# Altium PCB LM-008.PcbDoc (part 3 of 3)
Units mil, origin at the board's own origin, x right, y up, seen from the top; angles counter-clockwise.
Board outline 2639.74 x 2756.53 mil, 2 copper layers (Top Layer, Bottom Layer); 59 components, 36 nets, 707 pads, 397 vias.
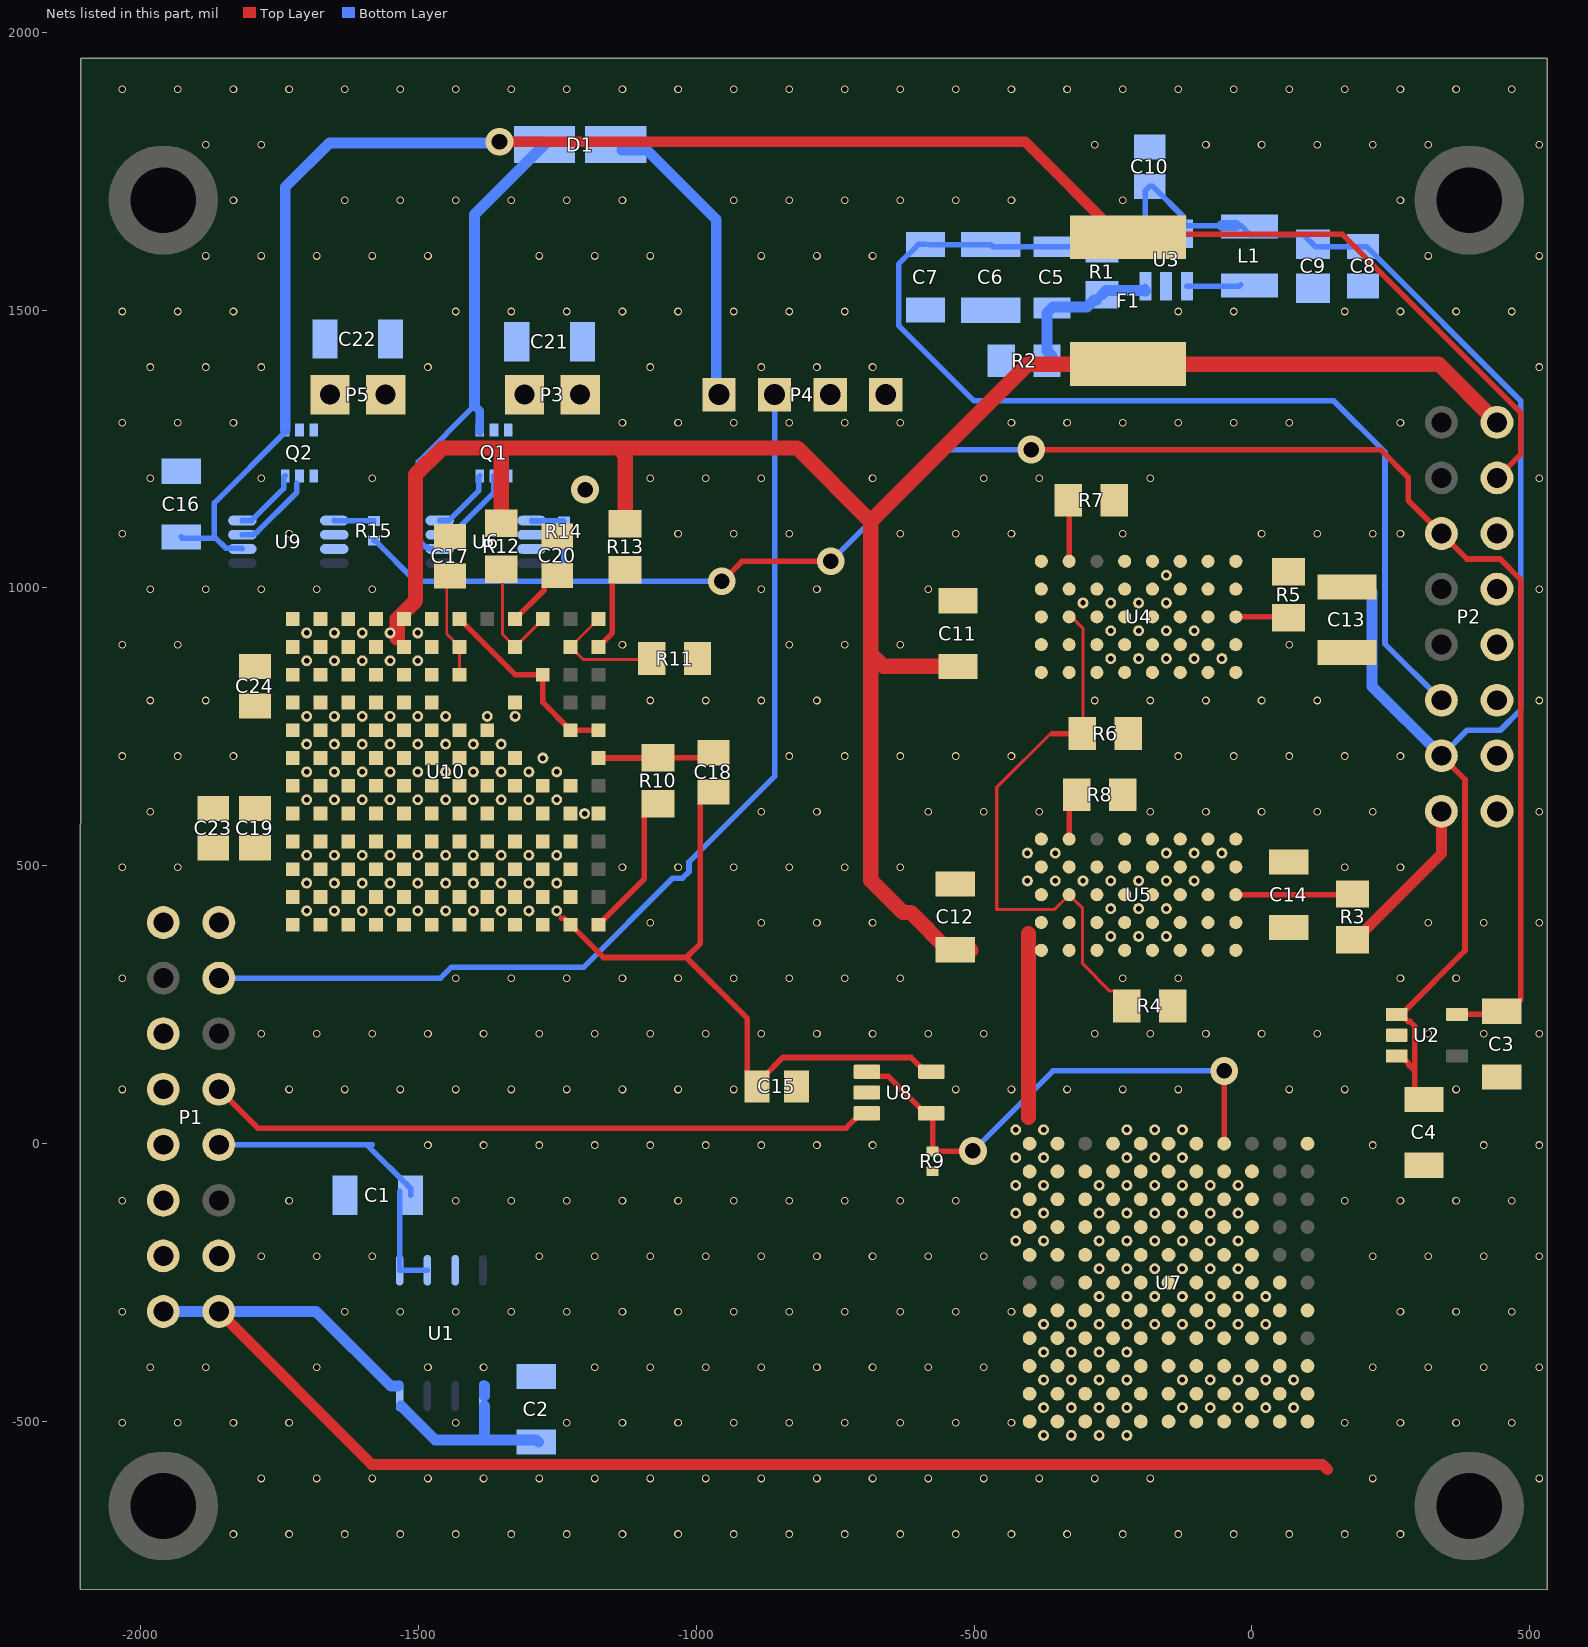
[diagram p2: the nets of this part, all layers, seen from the top]

## Via types
v1: diameter 13.78, hole 9.84, Top Layer to Bottom Layer, 390 vias
v2: diameter 50, hole 28, Top Layer to Bottom Layer, 7 vias

## Nets (pads, with @x,y where several pads share a name; then routed paths per layer and width w, separated by ;. In a path a pad name is that pad's centre, name@x,y a point inside that pad or via, vN(x,y) a via of type N, cw(c..) or ccw(c..) an arc to the next point about the centre after c; other vN are vias at no path point)
+3.3: C3.2 P2.6 R14.2 R15.2 U2.5 | length 3287.5
  Top Layer w10: v2(-954,1012) -918,1048 v2(-758,1048) ; v2(-397,1249) 231,1249 281.31,1198.69 281.31,1157.69 386.91,1052.09 446.88,1052.09 483.4,1015.56 483.4,259.17 462.53,238.3 C3.2@449.74,238.3 ; U2.5@364.94,232.59 C3.2@456.83,232.59
  Bottom Layer w10: R15.2@-1580,1085.28 -1578.03,1085.28 -1504.75,1012 -1267,1012 ; R14.2@-1238,1084.28 -1238,1041 -1267,1012 ; v2(-954,1012) -1267,1012 ; v2(-758,1048) -557,1249 v2(-397,1249)
+5: C4.2 C8.2 C9.2 C10.2 C13.1 L1.1 P2.14 R5.1 U2.1 U2.3 U3.4 U3.6 U4.A1 U4.A2 U4.B1 U4.B2 | length 2742.3
  Top Layer w10: U2.3@268.48,157.79 282.23,144.03 282.23,142.03 289,135.26 ; C4.2@289,95.82 305.57,79.24 C4.2@309.74,79.24 293.17,95.82 293.17,135.26 293.17,211.16 284.45,219.87 281.2,219.87 273.28,227.79 273.28,237.39 383.4,347.51 383.4,655.6 P2.14@341,698
  Bottom Layer w10: U3.4@-191.65,1637.6 -191.65,1714.91 C10.2@-184,1722.57 -178.09,1722.57 -122.68,1667.15 -122.68,1658.19 -116.58,1652.09 L1.1@-54,1652.09 ; L1.1@-20,1652.09 -3.35,1635.44 92.87,1635.44 113.94,1614.38 205.91,1614.38 483.4,1336.88 483.4,780.44 446.88,743.91 386.91,743.91 P2.14@345.5,702.5
  Bottom Layer w19.68: L1.1@-54,1652.09 L1.1@-29,1652.09 ; 216.16,992.84 216.16,822.84 P2.14@341,698
  other v1: 17.26,1097.53 117.26,1097.53 217.26,1097.53
"+5 BBB": C15.1 C18.2 C19.2 C23.2 P1.1 pad.4@-1251,419 pad.4@-1251,469 pad.4@-1251,519 pad.4@-1301,419 pad.4@-1301,469 pad.4@-1301,519 pad.4@-1351,419 pad.4@-1351,469 pad.4@-1351,519 pad.4@-1401,419 pad.4@-1401,469 pad.4@-1401,519 pad.4@-1451,419 pad.4@-1451,469 pad.4@-1451,519 pad.4@-1501,419 pad.4@-1501,469 pad.4@-1501,519 pad.4@-1551,419 pad.4@-1551,469 pad.4@-1551,519 pad.4@-1601,419 pad.4@-1601,469 pad.4@-1601,519 pad.4@-1651,419 pad.4@-1651,469 pad.4@-1651,519 pad.4@-1701,419 pad.4@-1701,469 pad.4@-1701,519 U8.5 U10.J1 U10.J2 U10.J3 U10.J4 U10.J5 U10.J6 U10.J7 U10.J8 U10.J9 U10.J10 U10.J11 U10.K1 U10.K2 U10.K3 U10.K4 U10.K5 U10.K6 U10.K7 U10.K8 U10.K9 U10.K10 U10.K11 U10.L1 U10.L2 U10.L3 U10.L4 U10.L5 U10.L6 U10.L7 U10.L8 U10.L9 U10.L10 U10.L11 U10.M1 U10.M2 U10.M3 U10.M4 U10.M5 U10.M6 U10.M7 U10.M8 U10.M9 U10.M10 U10.M11 | length 1208.4
  Top Layer w10: -1243,406 -1238,406 -1228.5,396.5 -1228.5,391.5 -1223.5,391.5 -1167,335 -1018,335 ; C18.2@-969,632.57 -974.91,632.57 -992.54,614.93 -992.54,360.46 -1018,335 ; C15.1@-890.43,103 C15.1@-890.43,118.57 ; U8.5@-576.93,129.4 -587.76,129.4 -613.43,155.07 -844.27,155.07 -880.77,118.57 C15.1@-890.43,118.57 ; -1018,335 -908.07,225.07 -908.07,126.54 -900.09,118.57 C15.1@-890.43,118.57
+9: C1.2 P1.9 U1.1 U1.2 | length 614
  Bottom Layer w10: P1.9@-1859,-2 -1583,-2 ; -1615,-2 -1592.15,-2 -1513.95,-80.2 C1.2@-1513.95,-93 ; C1.2@-1533.76,-86 U1.1@-1533.76,-227.72 U1.2@-1483.76,-227.72
+12: C2.2 P1.15 P1.16 pad.4@25,-425 pad.4@25,-475 pad.4@75,-425 pad.4@75,-475 pad.4@-25,-425 pad.4@-25,-475 pad.4@-75,-425 pad.4@-75,-475 pad.4@-125,-425 pad.4@-125,-475 U1.5 U1.8 U7.A1 U7.A2 U7.A3 U7.A4 U7.A5 U7.A6 U7.B1 U7.B2 U7.B3 U7.B4 U7.B5 U7.B6 U7.C1 U7.C2 U7.C3 U7.C4 U7.C5 U7.C6 | length 2943.8
  Top Layer w19.68: P1.15@-1859,-302 -1584,-577 127,-577 136,-586
  Bottom Layer w19.68: P1.16@-1959,-302 P1.15@-1859,-302 -1684,-302 -1549.61,-436.39 U1.8@-1536.72,-436.39 ; U1.8@-1530.81,-471.82 -1469.63,-533 -1380.85,-533 ; U1.5@-1380.85,-471.82 -1380.85,-533 ; U1.5@-1380.85,-454.1 U1.5@-1380.85,-436 ; C2.2@-1283.95,-537.05 -1288,-533 -1380.85,-533
-5: C14.2 P2.16 R3.2 U5.A4 U5.A5 U5.B4 U5.B5 | length 318.3
  Top Layer w19.68: R3.2@169,359.66 181,371.66 195.92,371.66 195.92,376.66 341,521.74 P2.16@341,598
Aux+: D1.1 P4.1 | length 521.9
  Bottom Layer w19.68: D1.1@-1134,1788 -1089,1788 -964,1663 P4.1@-964,1362.88
"Battery Thermistor": P1.2
Battery_1: C21.2 P3.1 Q1.1 Q1.2 Q1.5 Q1.6 U6.7 | length 159.1
  Bottom Layer w10: U6.7@-1461.68,1095.8 -1442.86,1095.8 -1439,1099.65 -1435.94,1099.65 -1364,1171.6 Q1.2@-1364,1201.66
Battery_2: C22.2 P5.1 Q2.1 Q2.2 Q2.5 Q2.6 U9.7 | length 145.5
  Bottom Layer w10: U9.7@-1816.68,1095.8 -1797.86,1095.8 -1794,1099.65 -1790.94,1099.65 -1718.84,1171.75 -1718.84,1188
GND: C1.1 C2.1 C3.1 C4.1 C6.1 C7.1 C8.1 C9.1 C10.1 C11.1 C12.1 C13.2 C14.1 C15.2 C16.1 C17.1 C19.1 C20.1 C21.1 C22.1 C23.1 C24.1 P1.6 P1.8 P1.10 P1.12 P1.13 P1.14 P2.5 P2.7 P2.9 P2.11 P2.13 P2.15 P3.2 P4.3 P4.4 P5.2 pad.4@25,-275 pad.4@25,-325 pad.4@-25,-75 pad.4@-25,-125 pad.4@-25,-175 pad.4@-25,-225 pad.4@-25,-275 pad.4@-25,-325 pad.4@-54,523 pad.4@-54,873 pad.4@-75,-75 pad.4@-75,-125 pad.4@-75,-175 pad.4@-75,-225 pad.4@-75,-275 pad.4@-75,-325 pad.4@-104,473 pad.4@-104,523 pad.4@-104,873 pad.4@-104,923 pad.4@-125,25 pad.4@-125,-25 pad.4@-125,-75 pad.4@-125,-125 pad.4@-125,-175 pad.4@-125,-225 pad.4@-125,-275 pad.4@-125,-325 pad.4@-154,373 pad.4@-154,423 pad.4@-154,473 pad.4@-154,523 pad.4@-154,873 pad.4@-154,923 pad.4@-154,973 pad.4@-154,1023 pad.4@-175,25 pad.4@-175,-25 pad.4@-175,-75 pad.4@-175,-125 pad.4@-175,-175 pad.4@-175,-225 pad.4@-175,-275 pad.4@-175,-325 pad.4@-204,373 pad.4@-204,423 pad.4@-204,473 pad.4@-204,873 pad.4@-204,923 pad.4@-204,973 pad.4@-225,25 pad.4@-225,-25 pad.4@-225,-75 pad.4@-225,-125 pad.4@-225,-175 pad.4@-225,-225 pad.4@-225,-275 pad.4@-225,-325 pad.4@-225,-375 pad.4@-225,-425 pad.4@-225,-475 pad.4@-225,-525 pad.4@-254,373 pad.4@-254,423 pad.4@-254,473 pad.4@-254,873 pad.4@-254,923 pad.4@-254,973 pad.4@-275,-75 pad.4@-275,-125 pad.4@-275,-175 pad.4@-275,-225 pad.4@-275,-275 pad.4@-275,-325 pad.4@-275,-375 pad.4@-275,-425 pad.4@-275,-475 pad.4@-275,-525 pad.4@-304,473 pad.4@-304,973 pad.4@-325,-325 pad.4@-325,-375 pad.4@-325,-425 pad.4@-325,-475 pad.4@-325,-525 pad.4@-354,473 pad.4@-354,523 pad.4@-375,-325 pad.4@-375,-375 pad.4@-375,-425 pad.4@-375,-475 pad.4@-375,-525 pad.4@-404,473 pad.4@-404,523 pad.4@-1201,594 pad.4@-1251,619 pad.4@-1251,669 pad.4@-1276,694 pad.4@-1301,619 pad.4@-1301,669 pad.4@-1326,769 pad.4@-1351,619 pad.4@-1351,669 pad.4@-1351,719 pad.4@-1376,769 pad.4@-1401,619 pad.4@-1401,669 pad.4@-1401,719 pad.4@-1451,619 pad.4@-1451,669 pad.4@-1451,719 pad.4@-1451,769 pad.4@-1501,619 pad.4@-1501,669 pad.4@-1501,719 pad.4@-1501,769 pad.4@-1551,619 pad.4@-1551,669 pad.4@-1551,719 pad.4@-1551,769 pad.4@-1601,619 pad.4@-1601,669 pad.4@-1601,719 pad.4@-1601,769 pad.4@-1651,619 pad.4@-1651,669 pad.4@-1651,719 pad.4@-1651,769 pad.4@-1701,619 pad.4@-1701,669 pad.4@-1701,719 pad.4@-1701,769 R2.2 R4.1 R6.1 R7.1 R8.1 R9.1 R11.1 U1.3 U2.2 U3.2 U4.A4 U4.A5 U4.B3 U4.B4 U4.B5 U4.C1 U4.C2 U4.C3 U4.C4 U4.C5 U4.D1 U4.D2 U4.D3 U4.D4 U4.D5 U4.E1 U4.E2 U4.E3 U4.E4 U4.E5 U4.F2 U4.F3 U4.F4 U4.F5 U4.G2 U4.H1 U4.H2 U4.H3 U5.A1 U5.A2 U5.B1 U5.B2 U5.B3 U5.C1 U5.C2 U5.C3 U5.C4 U5.C5 U5.D1 U5.D2 U5.D3 U5.D4 U5.D5 U5.E1 U5.E2 U5.E3 U5.E4 U5.E5 U5.F2 U5.F3 U5.F4 U5.F5 U5.G2 U5.H1 U5.H2 U5.H3 U6.2 U6.3 U7.A7 U7.A8 U7.A9 U7.A10 U7.A11 U7.B7 U7.B8 U7.B9 U7.B10 U7.B11 U7.C7 U7.C8 U7.C9 U7.C10 U7.C11 U7.D2 U7.D3 U7.D4 U7.D5 U7.D6 U7.D7 U7.D8 U7.D9 U7.D10 U7.D11 U7.E1 U7.E2 U7.E3 U7.E4 U7.E5 U7.E6 U7.E7 U7.E8 U7.E9 U7.E10 U7.E11 U7.F2 U7.F3 U7.F4 U7.F5 U7.F6 U7.F7 U7.F8 U7.F9 U7.G3 U7.G4 U7.G5 U7.G6 U7.G7 U7.G8 U7.G9 U7.H3 U7.H4 U7.H5 U7.H6 U7.H7 U7.H8 U7.H9 U7.J3 U7.J4 U7.J5 U7.J6 U7.J7 U7.J8 U7.J9 U7.K3 U7.K4 U7.K5 U7.K6 U7.K7 U7.K8 U7.K9 U7.L1 U7.L5 U7.L6 U7.L7 U7.L8 U8.2 U9.2 U9.3 U10.D1 U10.D2 U10.D3 U10.D4 U10.D5 U10.D6 U10.D9 U10.E1 U10.E2 U10.E3 U10.E4 U10.E5 U10.E6 U10.E7 U10.E8 U10.F1 U10.F2 U10.F3 U10.F4 U10.F5 U10.F6 U10.F7 U10.F8 U10.F9 U10.G1 U10.G2 U10.G3 U10.G4 U10.G5 U10.G6 U10.G7 U10.G8 U10.G9 U10.G10 U10.G11 U10.H1 U10.H2 U10.H3 U10.H4 U10.H5 U10.H6 U10.H7 U10.H8 U10.H9 U10.H10 U10.H11 U10.H12
  other v1: -1832.74,-702.47 -1732.74,-702.47 -1632.74,-702.47 -1532.74,-702.47 -1432.74,-702.47 -1332.74,-702.47 -1232.74,-702.47 -1132.74,-702.47 -1032.74,-702.47 -932.74,-702.47 -832.74,-702.47 -732.74,-702.47 -632.74,-702.47 -532.74,-702.47 -432.74,-702.47 -332.74,-702.47 -232.74,-702.47 -132.74,-702.47 -32.74,-702.47 67.26,-702.47 167.26,-702.47 267.26,-702.47 -1782.74,-602.47 -1682.74,-602.47 -1582.74,-602.47 -1482.74,-602.47 -1382.74,-602.47 -1282.74,-602.47 -1182.74,-602.47 -1082.74,-602.47 -982.74,-602.47 -882.74,-602.47 -782.74,-602.47 -682.74,-602.47 -582.74,-602.47 -482.74,-602.47 -382.74,-602.47 -282.74,-602.47 -182.74,-602.47 217.26,-602.47 517.26,-602.47 -2032.74,-502.47 -1932.74,-502.47 -1832.74,-502.47 -1732.74,-502.47 -1432.74,-502.47 -1232.74,-502.47 -1132.74,-502.47 -1032.74,-502.47 -932.74,-502.47 -832.74,-502.47 -732.74,-502.47 -632.74,-502.47 -532.74,-502.47 -432.74,-502.47 167.26,-502.47 267.26,-502.47 367.26,-502.47 467.26,-502.47 -1982.74,-402.47 -1882.74,-402.47 -1682.74,-402.47 -1482.74,-402.47 -1382.74,-402.47 -1182.74,-402.47 -1082.74,-402.47 -982.74,-402.47 -882.74,-402.47 -782.74,-402.47 -682.74,-402.47 -582.74,-402.47 -482.74,-402.47 217.26,-402.47 317.26,-402.47 417.26,-402.47 517.26,-402.47 -2032.74,-302.47 -1632.74,-302.47 -1532.74,-302.47 -1432.74,-302.47 -1332.74,-302.47 -1232.74,-302.47 -1132.74,-302.47 -1032.74,-302.47 -932.74,-302.47 -832.74,-302.47 -732.74,-302.47 -632.74,-302.47 -532.74,-302.47 -432.74,-302.47 267.26,-302.47 367.26,-302.47 467.26,-302.47 -1782.74,-202.47 -1682.74,-202.47 -1582.74,-202.47 -1282.74,-202.47 -1182.74,-202.47 -1082.74,-202.47 -982.74,-202.47 -882.74,-202.47 -782.74,-202.47 -682.74,-202.47 -582.74,-202.47 -482.74,-202.47 217.26,-202.47 317.26,-202.47 417.26,-202.47 517.26,-202.47 -2032.74,-102.47 -1732.74,-102.47 -1432.74,-102.47 -1332.74,-102.47 -1232.74,-102.47 -1132.74,-102.47 -1032.74,-102.47 -932.74,-102.47 -832.74,-102.47 -732.74,-102.47 -632.74,-102.47 -532.74,-102.47 167.26,-102.47 267.26,-102.47 367.26,-102.47 467.26,-102.47 -1482.74,-2.47 -1382.74,-2.47 -1282.74,-2.47 -1182.74,-2.47 -1082.74,-2.47 -982.74,-2.47 -882.74,-2.47 -782.74,-2.47 -682.74,-2.47 217.26,-2.47 417.26,-2.47 517.26,-2.47 -2032.74,97.53 -1732.74,97.53 -1632.74,97.53 -1532.74,97.53 -1432.74,97.53 -1332.74,97.53 -1232.74,97.53 -1132.74,97.53 -1032.74,97.53 -932.74,97.53 -532.74,97.53 -432.74,97.53 -332.74,97.53 -232.74,97.53 -132.74,97.53 67.26,97.53 167.26,97.53 367.26,97.53 -1782.74,197.53 -1682.74,197.53 -1582.74,197.53 -1482.74,197.53 -1382.74,197.53 -1282.74,197.53 -1182.74,197.53 -1082.74,197.53 -982.74,197.53 -882.74,197.53 -782.74,197.53 -682.74,197.53 -582.74,197.53 -482.74,197.53 -282.74,197.53 -182.74,197.53 -82.74,197.53 17.26,197.53 117.26,197.53 317.26,197.53 417.26,197.53 517.26,197.53 -2032.74,297.53 -1432.74,297.53 -1332.74,297.53 -1232.74,297.53 -1132.74,297.53 -1032.74,297.53 -932.74,297.53 -832.74,297.53 -732.74,297.53 -632.74,297.53 -232.74,297.53 -132.74,297.53 267.26,297.53 367.26,297.53 -1082.74,397.53 -882.74,397.53 -782.74,397.53 -682.74,397.53 317.26,397.53 417.26,397.53 517.26,397.53 -2032.74,497.53 -1932.74,497.53 -1132.74,497.53 -1032.74,497.53 -932.74,497.53 -832.74,497.53 -732.74,497.53 -632.74,497.53 167.26,497.53 267.26,497.53 -1982.74,597.53 -882.74,597.53 -782.74,597.53 -582.74,597.53 -482.74,597.53 -382.74,597.53 -182.74,597.53 -82.74,597.53 17.26,597.53 117.26,597.53 217.26,597.53 517.26,597.53 -2032.74,697.53 -1932.74,697.53 -1832.74,697.53 -832.74,697.53 -732.74,697.53 -632.74,697.53 -532.74,697.53 -432.74,697.53 -132.74,697.53 -32.74,697.53 67.26,697.53 167.26,697.53 267.26,697.53 -1982.74,797.53 -1882.74,797.53 -1082.74,797.53 -982.74,797.53 -882.74,797.53 -782.74,797.53 -282.74,797.53 -182.74,797.53 -82.74,797.53 17.26,797.53 117.26,797.53 517.26,797.53 -2032.74,897.53 -1932.74,897.53 -1132.74,897.53 -832.74,897.53 -732.74,897.53 -632.74,897.53 67.26,897.53 -1982.74,997.53 -1882.74,997.53 -1782.74,997.53 -1682.74,997.53 -1582.74,997.53 -882.74,997.53 -782.74,997.53 -582.74,997.53 517.26,997.53 -2032.74,1097.53 -1732.74,1097.53 -1032.74,1097.53 -932.74,1097.53 -832.74,1097.53 -632.74,1097.53 -532.74,1097.53 -432.74,1097.53 -232.74,1097.53 267.26,1097.53 -1982.74,1197.53 -1782.74,1197.53 -1582.74,1197.53 -1082.74,1197.53 -982.74,1197.53 -882.74,1197.53 -682.74,1197.53 -482.74,1197.53 -382.74,1197.53 -182.74,1197.53 517.26,1197.53 -2032.74,1297.53 -1932.74,1297.53 -1832.74,1297.53 -1132.74,1297.53 -1032.74,1297.53 -932.74,1297.53 -832.74,1297.53 -732.74,1297.53 -632.74,1297.53 -432.74,1297.53 -332.74,1297.53 -232.74,1297.53 -132.74,1297.53 -32.74,1297.53 67.26,1297.53 267.26,1297.53 -1982.74,1397.53 -1882.74,1397.53 -1782.74,1397.53 -1482.74,1397.53 -1082.74,1397.53 -882.74,1397.53 -782.74,1397.53 -682.74,1397.53 517.26,1397.53 -2032.74,1497.53 -1932.74,1497.53 -1832.74,1497.53 -1432.74,1497.53 -1332.74,1497.53 -1232.74,1497.53 -1132.74,1497.53 -1032.74,1497.53 -932.74,1497.53 -832.74,1497.53 -732.74,1497.53 -132.74,1497.53 -32.74,1497.53 167.26,1497.53 267.26,1497.53 367.26,1497.53 467.26,1497.53 -1882.74,1597.53 -1782.74,1597.53 -1682.74,1597.53 -1582.74,1597.53 -1482.74,1597.53 -1282.74,1597.53 -1182.74,1597.53 -1082.74,1597.53 -882.74,1597.53 -782.74,1597.53 -682.74,1597.53 317.26,1597.53 517.26,1597.53 -1832.74,1697.53 -1632.74,1697.53 -1532.74,1697.53 -1432.74,1697.53 -1332.74,1697.53 -1232.74,1697.53 -1132.74,1697.53 -932.74,1697.53 -832.74,1697.53 -732.74,1697.53 -632.74,1697.53 -532.74,1697.53 -432.74,1697.53 -232.74,1697.53 267.26,1697.53 -1882.74,1797.53 -1782.74,1797.53 -282.74,1797.53 -82.74,1797.53 17.26,1797.53 117.26,1797.53 217.26,1797.53 317.26,1797.53 517.26,1797.53 -2032.74,1897.53 -1932.74,1897.53 -1832.74,1897.53 -1732.74,1897.53 -1632.74,1897.53 -1532.74,1897.53 -1432.74,1897.53 -1332.74,1897.53 -1232.74,1897.53 -1132.74,1897.53 -1032.74,1897.53 -932.74,1897.53 -832.74,1897.53 -732.74,1897.53 -632.74,1897.53 -532.74,1897.53 -432.74,1897.53 -332.74,1897.53 -232.74,1897.53 -132.74,1897.53 -32.74,1897.53 67.26,1897.53 167.26,1897.53 267.26,1897.53 367.26,1897.53 467.26,1897.53
  other v2: -1200,1177
NetC5_1: C5.1 R1.2 R2.1 U3.3 | length 296.2
  Bottom Layer w10: R2.1@-368.66,1408.94 R2.1@-360,1417.6 ; R1.2@-279.61,1518 R1.2@-270,1527.61 ; U3.3@-191.65,1534.38 U3.3@-191.65,1543.12
  Bottom Layer w19.68: R2.1@-360,1417.6 -368.66,1426.27 -368.66,1495.16 -358.3,1505.52 -297.01,1505.52 -284.53,1518 R1.2@-279.61,1518 ; R1.2@-270,1527.61 -262.24,1535.36 -192.64,1535.36 U3.3@-191.65,1534.38
NetC16_2: C16.2 D1.2 F1.1 P2.3 Q1.4 Q2.4 U6.6 U9.6 | length 4370.1
  Top Layer w10: F1.1@-223,1631.17 -218,1636.17 162.79,1636.17 483.4,1315.56 483.4,1240.4 P2.3@441,1198
  Top Layer w19.68: v2(-1354,1803) -408,1803 F1.1@-238,1633
  Bottom Layer w10: C16.2@-1927,1091.94 -1924.9,1089.85 -1864.85,1089.85 -1846.68,1071.68 -1818.15,1071.68 U9.6@-1816.68,1070.2 ; -1867,1089.85 -1867,1152.99 -1739.59,1280.4 Q2.4@-1739.59,1284.34 ; U6.6@-1461.68,1070.2 -1480.5,1070.2 -1484.36,1074.06 -1487.41,1074.06 -1500.14,1086.79 -1500.14,1226.86 -1399,1328 ; v2@-1356,1801 v2(-1354,1803) ; D1.2@-1277.98,1803 D1.2@-1272.98,1798
  Bottom Layer w15.75: -1399,1328 -1389.59,1318.59 Q1.4@-1389.59,1281.4
  Bottom Layer w19.68: Q2.4@-1739.59,1284.34 -1739.59,1721.41 -1660,1801 v2@-1356,1801 ; -1399,1328 -1399,1671.98 D1.2@-1272.98,1798 ; v2(-1354,1803) D1.2@-1277.98,1803
NetC17_2: C17.2 U10.B7 U10.C7 | length 189.4
  Top Layer w5.04: C17.2@-1443,1021.57 -1448.8,1015.77 -1448.8,916.8 U10.B7@-1426,894 U10.C7@-1426,844
NetC18_1: C18.1 R10.1 U10.F12 | length 210.9
  Top Layer w10: U10.F12@-1176,694 -1069.34,694 R10.1@-1069,694.34 -978.09,694.34 C18.1@-969,703.43
NetC20_2: C20.2 U10.A9 | length 113.5
  Top Layer w10: U10.A9@-1326,944 -1273.54,996.46 -1273.54,1004.93 -1255.91,1022.57 C20.2@-1250,1022.57
NetL1_2: L1.2 U3.1 | length 98
  Bottom Layer w10: U3.1@-116.85,1543.12 -22.68,1543.12 L1.2@-20,1545.79
NetP1_3: P1.3 P4.2 | length 1862.6
  Bottom Layer w10: P1.3@-1859,298 -1460.22,298 -1440.93,317.29 -1202.71,317.29 -1042.24,477.76 -1024.55,477.76 -1012.98,489.34 -1012.98,507.02 -859,661 P4.2@-859,1348 P4.2@-859,1362.88
NetQ1_3: Q1.3 U6.8 | length 119.9
  Bottom Layer w10: U6.8@-1461.68,1121.39 -1444.94,1121.39 -1391.48,1174.85 -1391.48,1199.77 Q1.3@-1389.59,1201.66
NetQ2_3: Q2.3 U9.8 | length 122
  Bottom Layer w10: U9.8@-1816.68,1121.39 -1799.94,1121.39 -1742.46,1178.87 -1742.46,1198.79 Q2.3@-1739.59,1201.66
NetR3_1: R3.1 U5.A3 | length 208.7
  Top Layer w10: U5.A3@-29,448 R3.1@179.66,448
NetR4_2: R4.2 R6.2 U4.G3 U5.G3 | length 1007.3
  Top Layer w5.91: -360.67,739.67 -459,641.34 -459,421.45 -355.24,421.45 -333.69,443 -324,443 -304.83,423.83 -304.83,323.52 -255.89,274.57 -246.99,274.57 R4.2@-234,261.58 ; U4.G3@-329,948 -324.69,948 -304.17,927.48 -304.17,736.83 R6.2@-302.17,734.83
  Top Layer w10: -359,738 R6.2@-305.34,738
NetR5_2: R5.2 U4.A3 | length 95
  Top Layer w10: U4.A3@-29,948 R5.2@66,948
NetR7_2: R7.2 U4.G1 | length 109.8
  Top Layer w10: U4.G1@-330.34,1049.34 -329,1050.68 -329,1156.66 R7.2@-330.34,1158
NetR8_2: R8.2 U5.G1 | length 66.3
  Top Layer w10: U5.G1@-329,548 R8.2@-329,614.34
NetR10_2: R10.2 U10.M12 | length 264.9
  Top Layer w10: U10.M12@-1176,394 -1093.53,476.47 -1093.53,592.06 -1073.92,611.66 R10.2@-1069,611.66
NetR11_2: R11.2 U10.A12 U10.B11 | length 231.9
  Top Layer w5.04: U10.A12@-1176,944 U10.B11@-1226,894 -1203.2,871.2 -1098.46,871.2 R11.2@-1081.34,888.33
NetR12_2: R12.2 U10.A10 U10.B9 | length 203
  Top Layer w5.04: R12.2@-1350,1016.34 -1348.8,1015.13 -1348.8,916.8 U10.B9@-1326,894
  Top Layer w5.91: U10.B9@-1326,894 U10.A10@-1276,944
NetR13_2: R13.2 U10.B12 | length 166.2
  Top Layer w10: U10.B12@-1176,894 -1150.72,919.28 -1150.72,1013.06 -1129.12,1034.66 R13.2@-1123,1034.66
NetU10_A7: U10.A7 U10.C10 U10.E11 U10.E12 | length 362.1
  Top Layer w10: U10.A7@-1426,944 -1326,844 U10.C10@-1276,844 -1276,794 U10.E11@-1226,744 U10.E12@-1176,744
Power_IN: C11.2 C12.2 C24.2 F1.2 P2.1 pad.4@-375,25 pad.4@-375,-25 pad.4@-375,-75 pad.4@-375,-125 pad.4@-375,-175 pad.4@-425,25 pad.4@-425,-25 pad.4@-425,-75 pad.4@-425,-125 pad.4@-425,-175 pad.4@-1501,869 pad.4@-1501,919 pad.4@-1551,869 pad.4@-1551,919 pad.4@-1601,869 pad.4@-1601,919 pad.4@-1651,869 pad.4@-1651,919 pad.4@-1701,869 pad.4@-1701,919 R12.1 R13.1 U4.G4 U4.G5 U4.H4 U4.H5 U5.G4 U5.G5 U5.H4 U5.H5 U7.G10 U7.G11 U7.H10 U7.H11 U7.J10 U7.J11 U7.K10 U7.K11 U7.L10 U7.L11 U10.A1 U10.A2 U10.A3 U10.A4 U10.A5 U10.A6 U10.B1 U10.B2 U10.B3 U10.B4 U10.B5 U10.B6 U10.C1 U10.C2 U10.C3 U10.C4 U10.C5 U10.C6 | length 4147.2
  Top Layer w27.56: -1538,910 -1538,944 -1505.1,976.9 -1505.1,1203.9 -1457,1252 -1352,1252 ; R12.1@-1351,1116.34 -1351,1251 -1352,1252 ; R13.1@-1128,1115.34 -1128,1240 -1140,1252 ; -686,882 -686,1120 ; C11.2@-529,858.94 -531.95,861.9 -534.91,858.94 -662.94,858.94 -686,882 -686,474.25 -627.78,416.03 -613.88,416.03 -545.8,347.94 C12.2@-506,347.94 ; -402,47 -402,378 ; P2.1@441,1298 336.17,1402.83 -219.83,1402.83 -223,1406 -226.17,1402.83 -403.17,1402.83 -686,1120 ; -1352,1252 -1140,1252 ; -1140,1252 -818.01,1252 -686,1120
RC: R9.2 U7.L4 U8.1 U8.4 | length 926.8
  Top Layer w10: U8.1@-693.07,129.4 -685.28,121.61 -654.76,121.61 -587.76,54.6 U8.4@-576.93,54.6 -574.72,52.39 R9.2@-574.72,-8 ; R9.2@-575,-14.28 -574.36,-13.64 -502.64,-13.64 v2(-502,-13) ; U7.L4@-50,0 v2(-50,131)
  Bottom Layer w10: v2(-502,-13) -358,131 v2(-50,131)
Stat1: R14.1 U6.1 | length 59
  Bottom Layer w10: U6.1@-1296.32,1121.39 -1295.49,1120.55 -1238.83,1120.55 R14.1@-1238,1119.72
Stat2: R15.1 U9.1 | length 71.6
  Bottom Layer w10: U9.1@-1651.32,1121.39 -1650.99,1121.05 -1580.33,1121.05 R15.1@-1580,1120.72
Sys_Pwr_Enable: P1.7 U8.3 | length 1205.9
  Top Layer w10: P1.7@-1859,98 -1789,28 -730.5,28 -703.9,54.6 U8.3@-693.07,54.6
ZH: C5.2 C6.2 C7.2 P2.12 R1.1 U3.5 | length 2091.2
  Bottom Layer w10: C7.2@-587.35,1618.28 -600.14,1618.28 -635.65,1582.76 -635.65,1472.2 -500.16,1336.7 147.3,1336.7 239.46,1244.54 239.46,899.54 P2.12@341,798 ; C7.2@-580,1618 C6.2@-470,1618 -466.06,1614.06 -273.78,1614.06 -258.86,1599.14 -175.49,1599.14 -160.08,1614.56 -160.08,1631.78 U3.5@-154.25,1637.6
pads on no net: P1.4 P1.5 P1.11 P2.2 P2.4 P2.8 P2.10 U1.4 U1.6 U1.7 U2.4 U4.F1 U5.F1 U6.4 U6.5 U7.D1 U7.F1 U7.F10 U7.F11 U7.G1 U7.G2 U7.H1 U7.H2 U7.J1 U7.J2 U7.K1 U7.K2 U7.L2 U7.L3 U7.L9 U9.4 U9.5 U10.A8 U10.A11 U10.C11 U10.C12 U10.D11 U10.D12 U10.G12 U10.J12 U10.K12 U10.L12

## Polygon pours and split planes (outlines as drawn)
GND on Bottom Layer "GND_L02_P004" (solid, shelved, pour order 4): 529.06,1953.43 529.06,-802.47 -2108.74,-802.47 -2108.74,1953.43
GND on Bottom Layer "NONET_L02_P014" (solid, shelved, pour order 14): -584,1088 -584,933 -359,933 -359,973 -291,973 -291,803 -168,803 -167,804 -167,581 -197,581 -199,583 -199,508 -359,508 -359,573 -584,573 -584,431 -359,431 -359,468 -291,468 -291,288 -184,288 -184,189 -109,189 -109,428 -59,428 -59,478 141,478 141,913 -54,913 -54,973 -114,973 -114,1183 -194,1183 -194,1023 -359,1023 -359,1088
GND on Bottom Layer "GND" (solid, shelved, pour order 10): 230,1928.94 230,1308.94 -680,1308.94 -680,1928.94
no net on Bottom Layer "C21_1" (solid, shelved, pour order 8): -180,1558.94 -400,1558.94 -400,1368.94 -310,1368.94 -310,1478.94 -180,1478.94
ZH on Bottom Layer "ZH" (solid, shelved, pour order 6): -140,1668.94 -640,1668.94 -640,1568.94 -630,1578.94 -140,1578.94
+5 on Bottom Layer "5V" (solid, shelved, pour order 0): 201.26,1593.43 -208.74,1593.43 -208.74,1743.43 201.26,1743.43
GND on Top Layer "NONET_L01_P002" (solid, shelved, pour order 2): -2109.74,1953.53 -2109.74,-806.47 530.26,-806.47 530.26,1953.53

## Other copper
Top Layer:
  rectangle net GND: -379,498 -184,503
  rectangle net GND: -179,569.24 -34,573
  rectangle net GND: -79,489.49 -8.45,498
  rectangle net GND: -284,326.76 -120.49,327.45
  rectangle net -5: -94,298 231,413
  rectangle net GND: -87,-225 22,-27
  rectangle net GND: -187,-278 76,-224
  rectangle net GND: -86,-364 71,-321
  rectangle net GND: -86,-325 165,-272
  rectangle net GND: -273,-32 -87,48
  rectangle net GND: -315,-364 -85,-27
  rectangle net GND: -460,-559 -184,-281
  rectangle net +12: -167,-602 148,-381
  rectangle net Power_IN: -459,-213 -334,48
  rectangle net +5: -104,983 226,1199
  rectangle net Power_IN: -584,803 -315,923
  rectangle net Power_IN: -584,288 -316,405
  rectangle net "+5 BBB": -1899,367 -1204,566
  rectangle net Power_IN: -1899,830 -1460,973
  region net GND: -1899.5,577 -1154.5,577 -1154.5,622 -1209.5,622 -1209.5,717 -1249.5,717 -1309.5,777 -1309.5,815.4 -1899.5,815.4
  region net GND: -14,663 -14,483 -54,483 -54,432.28 -113.28,432.28 -113.28,328 -294,328 -294,468 -354,468 -354,438 -359.72,432.27 -429,432.28 -429,568 -414,568 -349,568 -349,508 -249,508 -249,663
  region net GND: -114,1208 -114,973 -54,973 -54,923 1,923 1,833 -189,833 -291,833 -291,968 -354,968 -354,933 -404,933 -404,1073 -359,1073 -359,1013 -249,1013 -249,1208
Bottom Layer:
  rectangle net "+5 BBB": -1899,367 -1204,566
  rectangle net Power_IN: -1899,830 -1460,973
  rectangle net Battery_2: -1719,1188 -1624,1483
  rectangle net Battery_1: -1369,1188 -1274,1478
  rectangle net +5: -104,983 226,1199
  region net GND: -1899,578 -1154,578 -1154,623 -1209,623 -1209,718 -1249,718 -1309,778 -1309,816.4 -1899,816.4

## Silkscreen, mask and mechanical layers (free items; w line width, h text height)
Top Overlay:
  circle w3.94: c-1381.85,-54.94 r183.58
  circle w10: c-1381.85,-54.94 r196.85
  lines w5: -1441.85,38.06 -1411.85,8.06 -1381.85,28.06 -1421.85,-21.94 -1361.85,8.06 -1401.85,-41.94 -1341.85,-11.94 -1381.85,-61.94 -1321.85,-31.94 -1361.85,-81.94 -1301.85,-51.94 -1321.85,-81.94 -1291.85,-111.94
  lines w10: -1461.85,43.06 -1421.85,43.06 ; -1441.85,38.06 -1441.85,-111.94 -1291.85,-111.94 ; -1286.85,-131.94 -1286.85,-91.94
  text "Battery 2" at -1817,1886 h39.37
  text "Battery 1" at -1393,1886 h39.37
  text "Aux/ lid" at -959,1873 h39.37
  text "ZLS" at -1421.85,-184.94 h47.24
  text "Power Input Module" at -1686.85,-474.94 h39.37
  text "LM-008" at -1676.85,-524.94 h39.37
  text "REV A1" at -1676.85,-604.94 h39.37
  text "ZLS Corp" at -1676.85,-674.94 h39.37

## Dimensions
391,-652 to 441,598 on Mechanical 1
-1959,-652 to -1959,-302 on Mechanical 1
391,-652 to 391,1698 on Mechanical 1
-1959,-652 to 391,-652 on Mechanical 1
-1959,-652 to -2109,-802 on Mechanical 1
-2109,-802 to -2109,1953.91 on Mechanical 1
-2109,-802 to 529.06,-841.84 on Mechanical 1